# EAGLE board 50k-celebration-pcb (EAGLE 9.5.2)
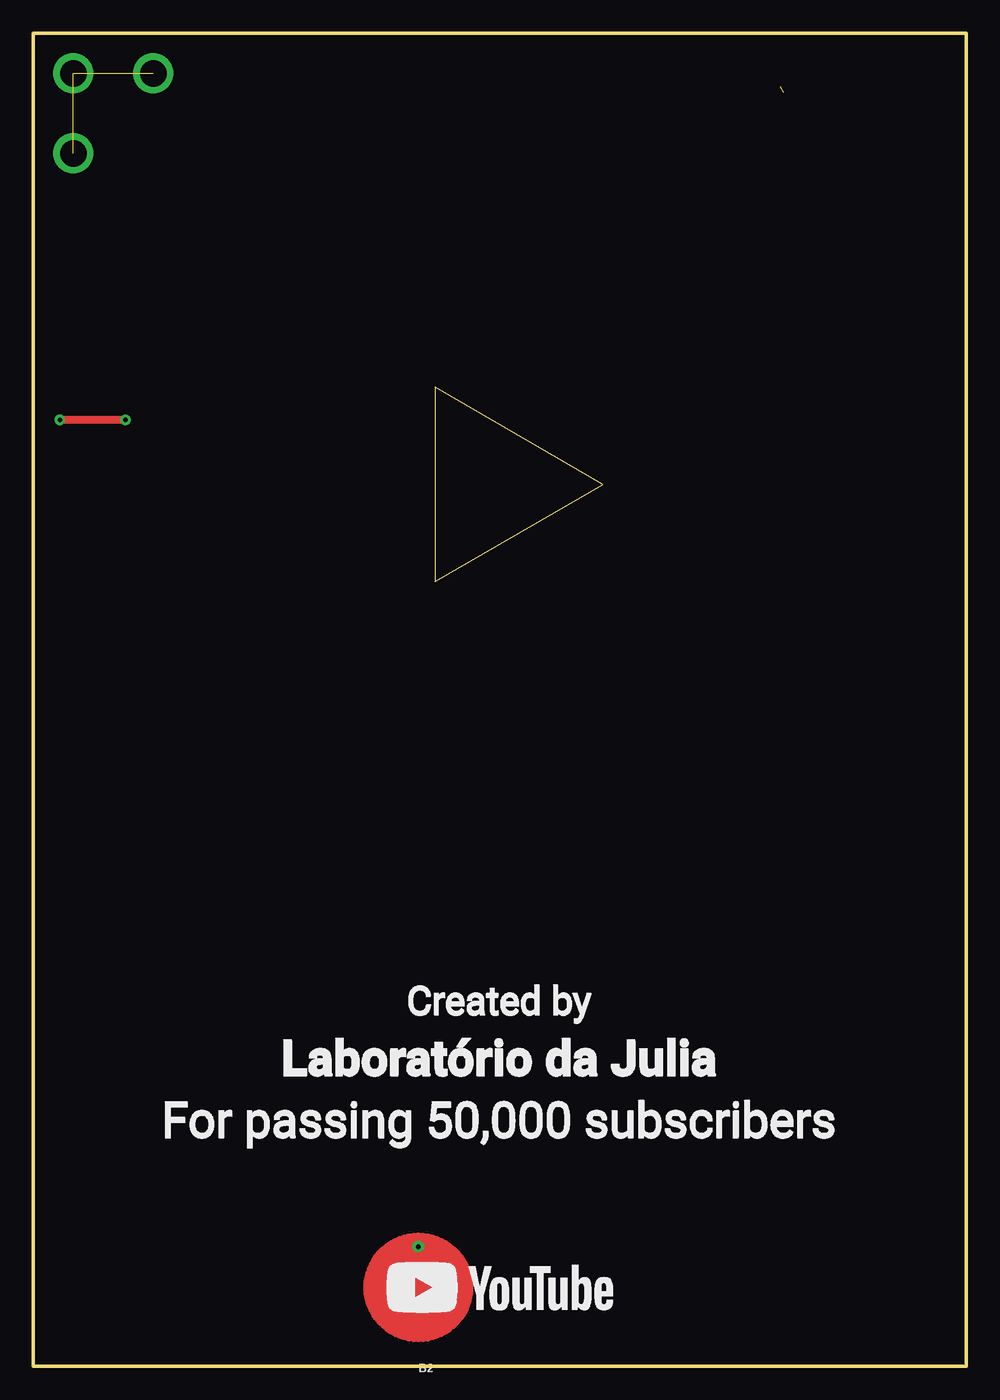
[diagram p0: board, top side]
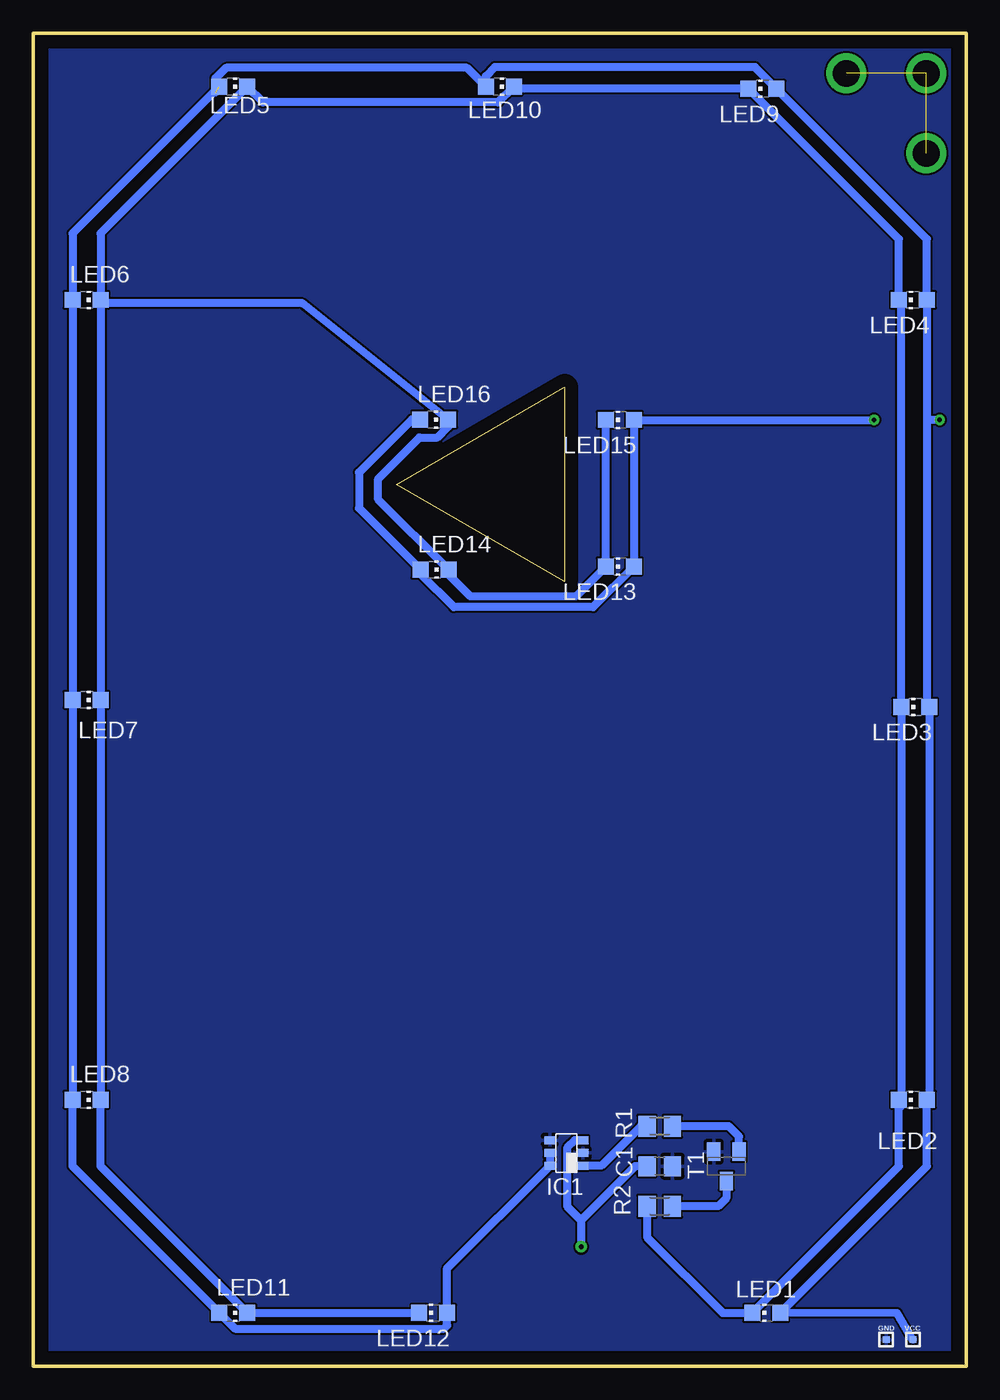
[diagram p1: board, bottom side, seen from below]

Size 70 x 100 mm. Coordinates in mm from the lower left corner, seen from the top.
Outline: 0,100 70,100 70,0 0,0 0,100
Outline: 30.15,58.88 42.76,66.15 30.13,73.45 30.15,58.88
Copper layers (1*16): Top 0.035mm / dielectric 1.5mm / Bottom 0.035mm
Design rules "default": minimum track width 6mil, minimum drill 0.35mm, track to track 6mil, track to pad 6mil, pad to pad 6mil, via to via 6mil, smd to smd 6mil, copper to edge 40mil, drill to drill 6mil, minimum pad ring 10mil, minimum via ring 8mil, stop-mask expansion 4mil, vias tented up to drill 3mm, thermal gap 10mil

## Footprints (pad centres in the part's own frame; a part is rotated, then mirrored left to right if it is on the bottom)
BUTTON_PASSIVE_8MM = drill 0.356: BUTTON 0,3.048
C0805 = smd 1.3 x 1.5: 1 -0.95,0; 2 0.95,0
WPAD-1-SQ-0.5MM = smd 0.5 x 0.5: 1 0,0
TSOT23-6_DDC = smd 0.6 x 0.8: 1 -0.95,-1.25; 2 0,-1.25; 3 0.95,-1.25; 4 0.95,1.25; 5 0,1.25; 6 -0.95,1.25
CHIP-LED0805 = smd 1.2 x 1.2: A 0,-1.05; C 0,1.05
M0805 = smd 1.3 x 1.6: 1 -0.95,0; 2 0.95,0
SOT23-BEC = smd 1 x 1.4: B -0.95,-1.1; C 0,1.1; E 0.95,-1.1

## Placement (x,y rotation side)
B2  [BUTTON_PASSIVE_8MM]  28.89,5.91 0 top
C1  22pf  [C0805]  23,15 0 bottom
GND  [WPAD-1-SQ-0.5MM]  6,2 0 bottom
IC1  TTP223  [TSOT23-6_DDC]  30,16 90 bottom
LED1  [CHIP-LED0805]  15,4 90 bottom
LED2  [CHIP-LED0805]  4,20 90 bottom
LED3  [CHIP-LED0805]  3.82,49.46 90 bottom
LED4  [CHIP-LED0805]  4,80 90 bottom
LED5  [CHIP-LED0805]  55,96 270 bottom
LED6  [CHIP-LED0805]  66,80 270 bottom
LED7  [CHIP-LED0805]  66,50 270 bottom
LED8  [CHIP-LED0805]  66,20 270 bottom
LED9  [CHIP-LED0805]  15.28,95.84 90 bottom
LED10  [CHIP-LED0805]  35,96 270 bottom
LED11  [CHIP-LED0805]  55,4 270 bottom
LED12  [CHIP-LED0805]  40,4 90 bottom
LED13  [CHIP-LED0805]  26,60 90 bottom
LED14  [CHIP-LED0805]  39.9,59.76 270 bottom
LED15  [CHIP-LED0805]  26,71 90 bottom
LED16  [CHIP-LED0805]  39.92,71.02 270 bottom
R1  150  [M0805]  23,18 0 bottom
R2  150  [M0805]  23,12 180 bottom
T1  [SOT23-BEC]  18,15 180 bottom
VCC  [WPAD-1-SQ-0.5MM]  4,2 0 bottom

## Library data of the parts
B2 = PatternAgents-TouchWidgets
C1 = rcl; SPICEPREFIX: C
GND VCC = PatternAgents-ProtoPads; BOM: EXCLUDE
IC1 = texas; MPN: TPS61070DDCR; OC_FARNELL: 1461062; OC_NEWARK: 64M3125
LED1-LED16 = led
R1 R2 = rcl; SPICEPREFIX: R
T1 = transistor

## Nets
DRIVER: IC1.1 R1.1
GND: C1.2 GND.1 IC1.2 IC1.4 T1.E
LEDS: LED1.C LED2.C LED3.C LED4.C LED5.C LED6.C LED7.C LED8.C LED9.C LED10.C LED11.C LED12.C LED13.C LED14.C LED15.C LED16.C R2.2
N$2: R1.2 T1.B
N$3: R2.1 T1.C
N$11: B2.BUTTON C1.1 IC1.3
VCC: IC1.5 IC1.6 LED1.A LED2.A LED3.A LED4.A LED5.A LED6.A LED7.A LED8.A LED9.A LED10.A LED11.A LED12.A LED13.A LED14.A LED15.A LED16.A VCC.1

## Tracks (layer width: path | path; a pad name or v marks a point on that pad's centre or on a via)
DRIVER
  Bottom 0.61: R1.1 24.42,18 27.37,15.05 IC1.1
GND
  pour Bottom (rank 3): -0.02,-0.02 -0.02,99.99 70,99.99 70.01,99.98 70.01,0.01 0.01,0.01
LEDS
  Bottom 0.61: R2.2 23.95,9.68 18.27,4 LED1.C 5.05,15 5.05,19.33 | 5.05,19.33 LED2.C | 5.05,19.33 4.87,19.51 LED3.C 4.87,79.82 LED4.C 5.05,84.56 LED9.C 33.79,95.84 LED10.C 35.13,94.82 52.77,94.82 LED5.C 64.95,85 LED6.C 64.95,79.75 | 64.95,79.75 LED7.C LED8.C 64.95,15 LED11.C LED12.C | 27.21,71.16 LED15.C LED13.C 29.29,57.76 37.2,57.76 38.85,59.41 LED14.C 44.12,65.03 44.12,66.57 41.02,69.67 39.68,69.67 38.87,70.48 LED16.C 49.8,79.75 64.95,79.75
N$1  (via drill 2)  (2 unrouted)
  other vias: 3,97 3,91 9,97
N$2
  Bottom 0.61: T1.B 17.05,17.23 17.82,18 R1.2
N$3
  Bottom 0.61: T1.C 18,12.61 18.61,12 R2.1
N$11
  Bottom 0.61: C1.1 24.84,15 28.89,10.95 | 28.89,10.95 B2.BUTTON | IC1.3 29.36,16.95 29.94,16.37 29.94,12 28.89,10.95
VCC  (via drill 0.35)  (1 unrouted)
  Top 0.61: v6.91,71 v1.99,71
  Bottom 0.61: 2.95,70.94 LED4.A 2.95,84.56 LED9.A 15.85,97.46 35.38,97.46 36.05,96.79 LED10.A 37.46,97.41 55.55,97.41 56.32,96.64 56.32,95.56 | 2.95,70.94 2.95,49.64 LED3.A 2.77,20.18 LED2.A 2.95,15 LED1.A 5.18,3.97 VCC.1 | LED5.A 67.05,85 LED6.A LED7.A LED8.A 67.05,15 LED11.A 54.87,2.82 39.19,2.82 38.95,3.06 LED12.A 38.95,7.35 IC1.6 IC1.5 | LED16.A 41.6,71.02 45.57,67.05 45.57,64.38 LED14.A 40.95,59.45 38.45,56.95 28,56.95 LED13.A LED15.A v6.91,71 | v1.99,71 2.89,71 2.95,70.94